# Altium PCB imx6_cpu_board.PcbDoc (part 7 of 9)
Units mil, origin at the board's own origin, x right, y up, seen from the top; angles counter-clockwise.
Board outline 2598.43 x 2362.2 mil, 8 copper layers (Top Layer, GND1, Signal Layer 1, POWER1, POWER2, Signal Layer 2, GND2, Bottom Layer), stack 66.304 mil thick; 354 components, 422 nets, 2180 pads, 1333 vias.
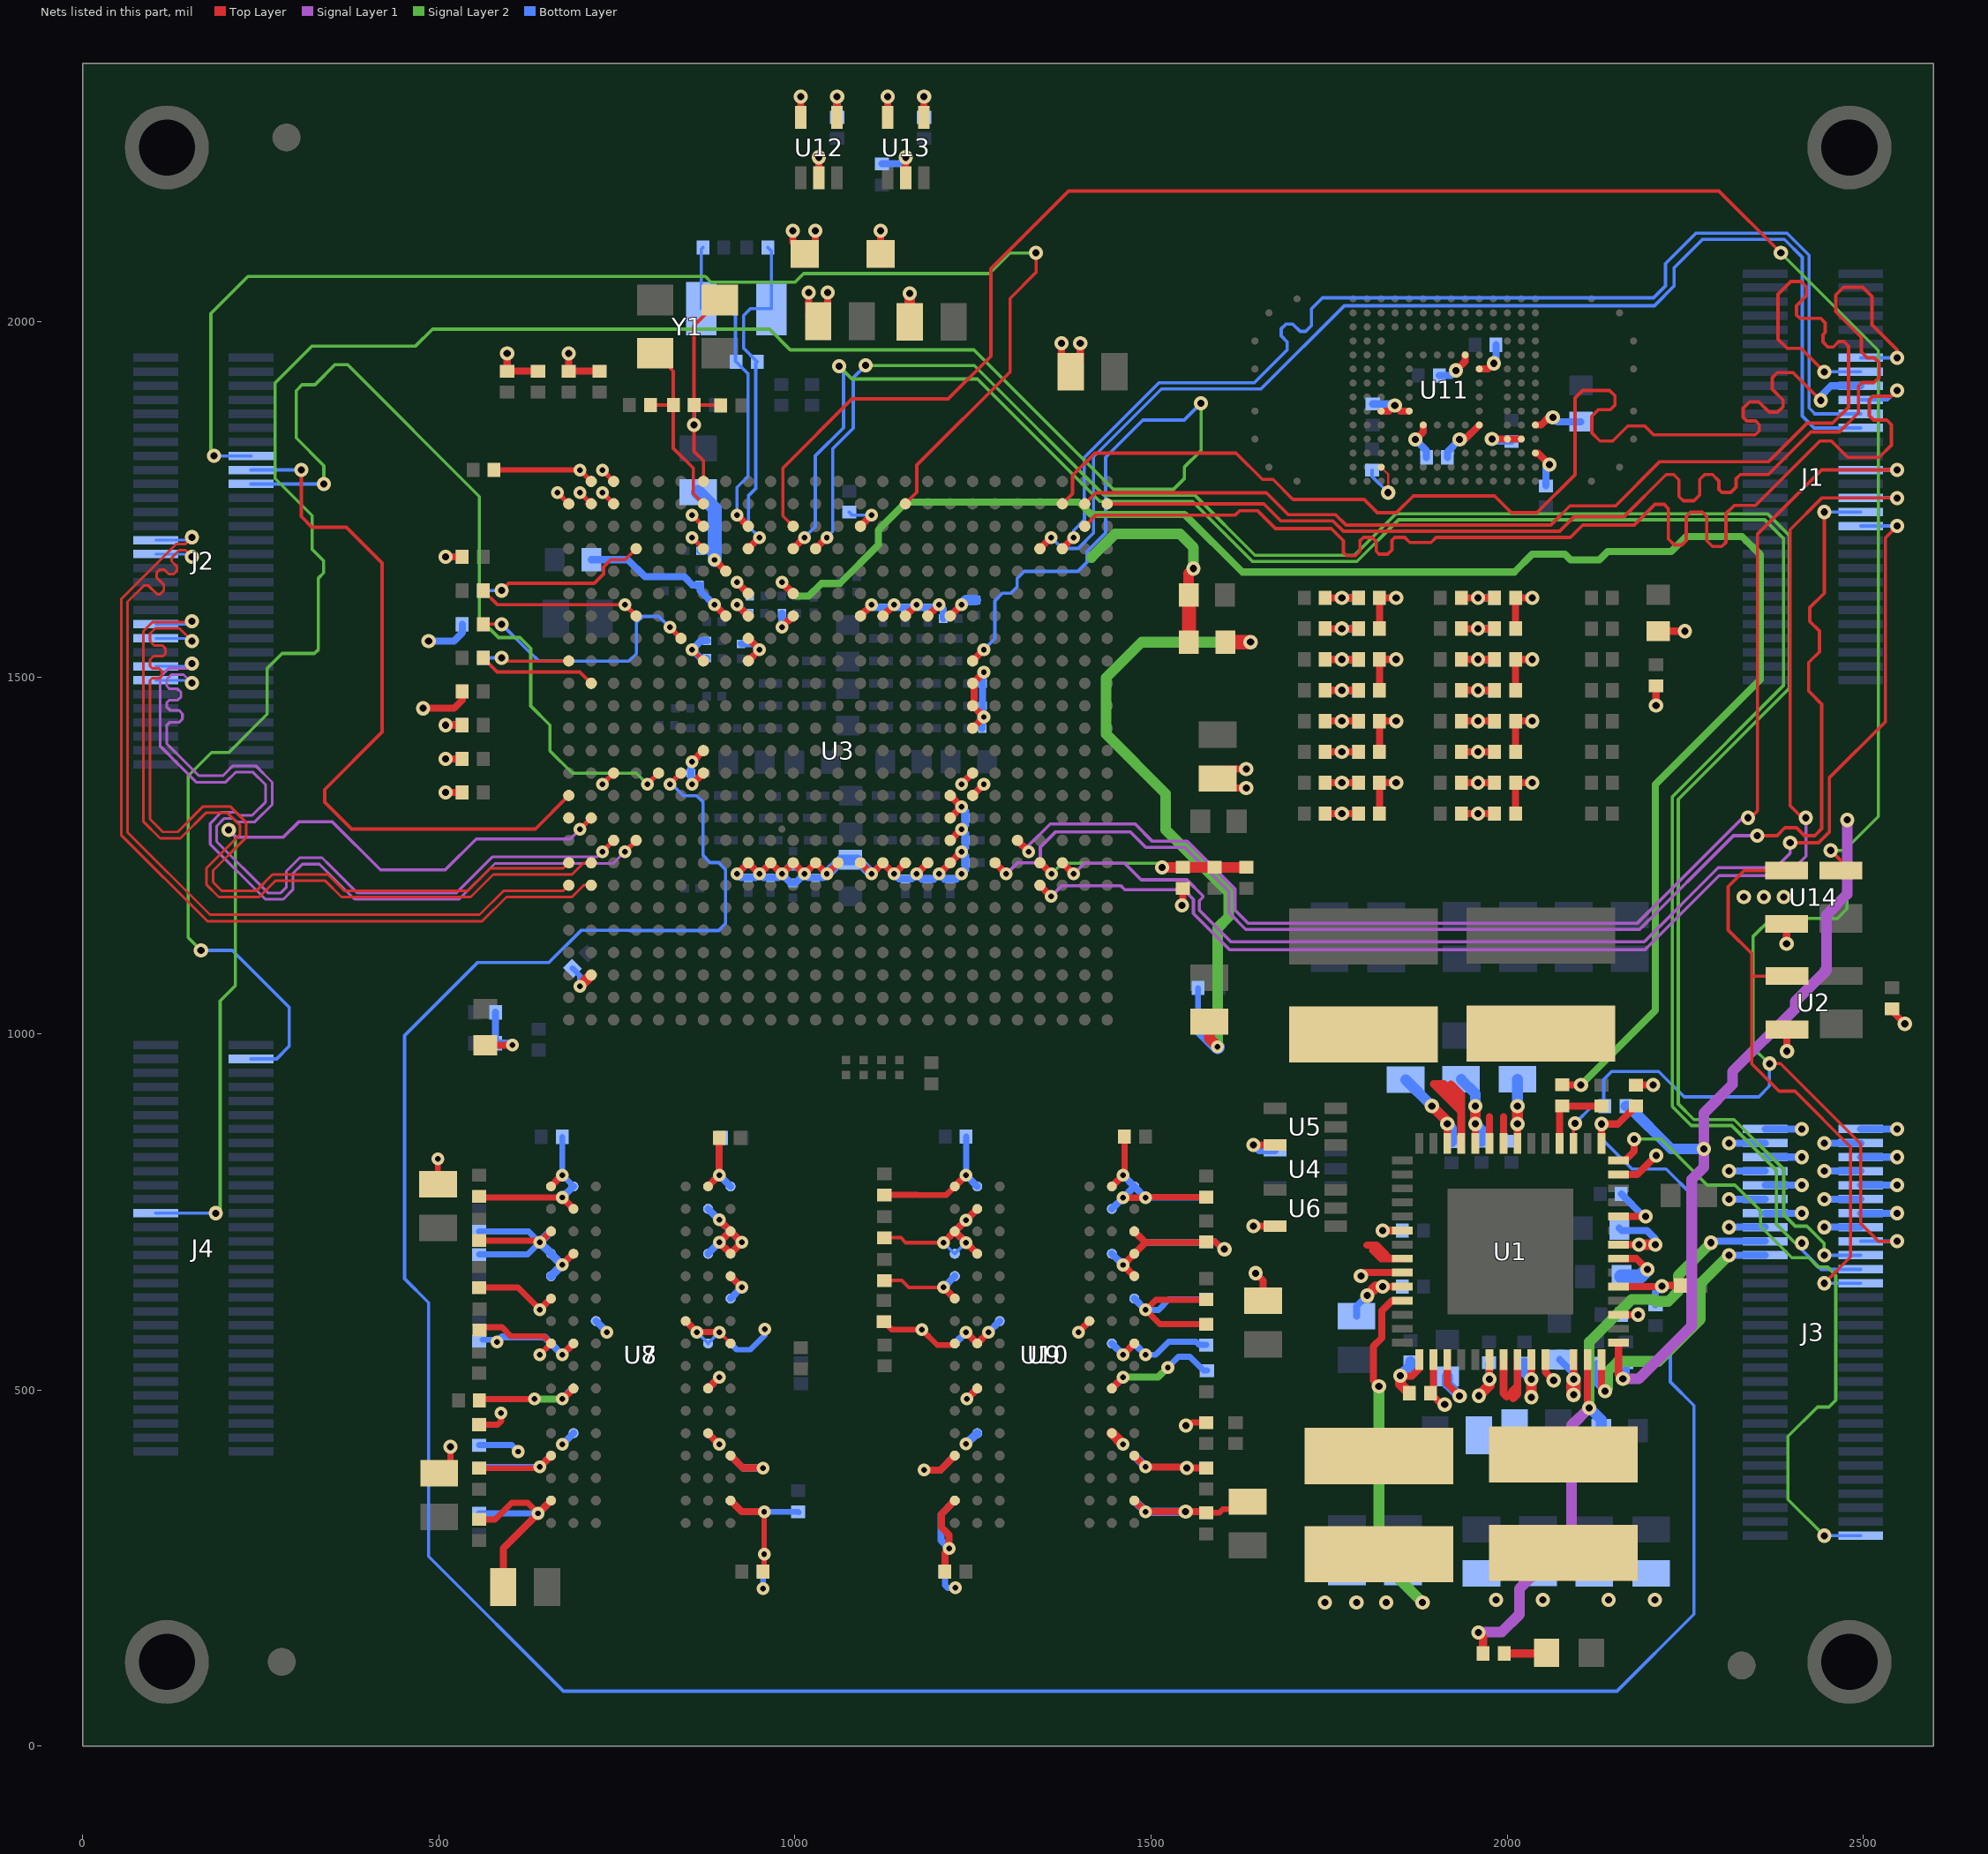
[diagram p13: the nets of this part, all layers, seen from the top]

## Via types
v1: diameter 18, hole 8, Top Layer to Bottom Layer, tented both sides, 768 vias
v2: diameter 20, hole 10, Top Layer to Bottom Layer, tented both sides, 565 vias

## Nets (pads, with @x,y where several pads share a name; then routed paths per layer and width w, separated by ;. In a path a pad name is that pad's centre, name@x,y a point inside that pad or via, vN(x,y) a via of type N, cw(c..) or ccw(c..) an arc to the next point about the centre after c; other vN are vias at no path point) (continued)
LVDS0-TX1_N: J2.45 U3.U4 | length 1250.3
  Top Layer w7: v1(761.17,1255.61) U3.U4@776.92,1271.36
  Signal Layer 1 w3.8: v2(153.54,1519.72) 146.83,1513 120.87,1513 109,1501.13 109,1403.39 159.28,1353.1 200.83,1353.1 214.73,1367 239.27,1367 257,1349.27 257,1325.38 238.02,1306.41 219.74,1306.41 215.29,1310.85 194.71,1310.85 179,1295.14 179,1266 256.32,1188.68 281.73,1188.68 295,1201.95 295,1224.58 308.42,1238 332.31,1238 381.64,1188.68 528.4,1188.68 578.73,1239 723.48,1239 744.57,1239.01 v1(761.17,1255.61)
  Bottom Layer w3.7: J2.45@102.36,1515.75 149.57,1515.75 v2(153.54,1519.72)
LVDS0-TX1_P: J2.47 U3.U3 | length 1250.7
  Top Layer w7: v1(729.67,1255.61) U3.U3@745.42,1271.36
  Signal Layer 1 w3.8: v2(153.54,1492.09) 141.64,1504 124.59,1504 118,1497.41 118,1488 122,1484 133.23,1484 138,1479.23 138,1472.83 133.17,1468 121.25,1468 118,1464.75 118,1458.5 122.5,1454 135,1454 140,1449 140,1441.91 135.09,1437 122,1437 118,1433 118,1407.12 163.01,1362.1 197.1,1362.1 211,1376 243,1376 266,1353 266,1321.66 241.75,1297.41 216.01,1297.41 211.57,1301.85 198.43,1301.85 188,1291.42 188,1269.73 260.05,1197.68 278,1197.68 286,1205.68 286,1228.31 304.69,1247 336.04,1247 346.19,1236.85 385.36,1197.68 524.68,1197.68 575,1248 722.05,1248 v1(729.67,1255.61)
  Bottom Layer w3.7: J2.47@102.36,1496.06 149.58,1496.06 v2(153.54,1492.09)
LVDS0-TX2_N: J2.39 U3.V2 | length 1250.3
  Top Layer w3.7: v2(153.54,1578.77) 152.77,1578 98.27,1578 85.49,1565.22 85.49,1297.51 108.77,1274.23 137.16,1274.23 139.8,1276.87 172.93,1310 203.34,1310 220.8,1292.54 220.8,1279.46 174,1232.66 174,1209 191.19,1191.81 247.73,1191.81 270.92,1215 340,1215 363.19,1191.81 544.81,1191.81 576.31,1223.31 686.88,1223.31 703.43,1239.86 U3.V2@713.92,1239.86
  Bottom Layer w3.7: J2.39@102.36,1574.8 149.57,1574.8 v2(153.54,1578.77)
LVDS0-TX2_P: J2.41 U3.V1 | length 1249.6
  Top Layer w3.7: v2(153.54,1551.15) 135.69,1569 102,1569 94.49,1561.49 94.49,1551 100.49,1545 112,1545 116,1541 116,1533 113,1530 99.49,1530 94.49,1525 94.49,1516 97.49,1513 107,1513 111,1509 111,1502 108,1499 97.49,1499 94.49,1496 94.49,1301.24 112.5,1283.23 133.43,1283.23 169.2,1319 207.07,1319 229.8,1296.27 229.8,1275.73 183,1228.93 183,1212.73 194.92,1200.81 244,1200.81 266.5,1223.31 344.42,1223.31 366.92,1200.81 541.08,1200.81 572.58,1232.31 674.88,1232.31 U3.V1@682.43,1239.86
  Bottom Layer w3.7: J2.41@102.36,1555.12 149.58,1555.12 v2(153.54,1551.15)
LVDS0-TX3_N: J2.27 U3.W2 | length 1250.3
  Top Layer w3.7: v2(153.54,1696.88) 144.23,1687.57 131.57,1687.57 53.99,1609.99 53.99,1279.01 175,1158 561,1158 594.81,1191.81 686.88,1191.81 703.43,1208.36 U3.W2@713.92,1208.36
  Bottom Layer w3.7: J2.27@102.36,1692.91 149.57,1692.91 v2(153.54,1696.88)
LVDS0-TX3_P: J2.29 U3.W1 | length 1250.3
  Top Layer w3.7: v2(153.54,1669.26) 144.23,1678.57 135.3,1678.57 124.73,1668 124.73,1663.27 132,1656 132,1649.3 128,1645.3 120.7,1645.3 114.36,1651.64 108.36,1651.64 104,1647.27 104,1640 114,1630 114,1622.36 108.64,1617 104.28,1617 92.33,1628.95 85.68,1628.95 62.99,1606.26 62.99,1282.74 178.73,1167 557.27,1167 591.08,1200.81 674.88,1200.81 U3.W1@682.43,1208.36
  Bottom Layer w3.7: J2.29@102.36,1673.23 149.58,1673.23 v2(153.54,1669.26)
MAIN-POWER: C1.1 C4.1 C12.1 C13.1 C18.1 C19.1 C24.1 C25.1 C26.1 C27.1 C30.1 C31.1 C32.1 C35.1 C36.1 C37.2 J3.1 J3.2 J3.3 J3.4 J3.5 J3.6 J3.7 J3.8 U1.7 U1.10 U1.12 U1.20 U1.23 U1.24 U1.34 U1.37 U1.40 U1.45 U1.50 | length 1383.5
  Top Layer w10: v2(1794.41,659.89) 1799.12,664.61 U1.23@1852.72,664.61 ; v2(1825.16,644.93) U1.24@1852.64,644.93 ; v2(1825.16,723.67) U1.20@1852.64,723.67 ; U1.12@1915.79,845.79 v2(1915.79,873.35) ; U1.10@1955.16,845.79 v2(1955.16,873.27) ; v2(1974.83,514.93) U1.34@1974.83,542.42 ; U1.7@2014.21,845.79 v2(2014.21,873.27) ; v2(2033.89,514.93) U1.37@2033.89,542.42 ; v2(2092.95,515.01) U1.40@2092.95,542.49 ; U1.50@2156.02,703.98 v2(2184.68,703.98) ; U1.45@2156.02,605.56 v2(2183.57,605.56)
  Top Layer w15: v2(1803.15,632.34) 1815.74,644.93 v2(1825.16,644.93) ; v2(1894.06,898.54) 1915.79,876.81 v2(1915.79,873.35) ; v2(1955.16,873.27) v2(1955.16,898.47) ; v2(1960.06,491.67) 1974.83,506.45 v2(1974.83,514.93) ; v2(2014.21,873.27) v2(2014.21,898.47) ; v2(2033.89,489.74) v2(2033.89,514.93) ; v2(2184.68,703.98) v2(2207.91,703.98)
  Top Layer w20: v2(2092.95,492.96) v2(2092.95,515.01)
  Bottom Layer w10: C36.1@1788.22,603.59 1788.22,617.42 v2(1803.15,632.34) ; v2(1825.16,723.67) C32.1@1852.64,723.67 ; C27.1@1974.44,537.84 1974.44,515.32 v2(1974.83,514.93) ; C4.1@2073.27,542.49 2092.95,522.81 v2(2092.95,515.01) ; C1.1@2157.18,727 2160.51,723.67 2196,723.67 2207.91,711.76 v2(2207.91,703.98) ; C37.2@2160.66,605.56 v2(2183.57,605.56) ; v2(2311.02,807.09) J3.7@2362.2,807.09 ; v2(2311.02,846.46) J3.3@2362.2,846.46 ; J3.5@2362.2,826.77 v2(2413.39,826.77) ; J3.1@2362.2,866.14 v2(2413.39,866.14) ; v2(2444.88,807.09) J3.8@2496.06,807.09 ; v2(2444.88,846.46) J3.4@2496.06,846.46 ; J3.6@2496.06,826.77 v2(2547.24,826.77) ; J3.2@2496.06,866.14 v2(2547.24,866.14)
  Bottom Layer w15: C31.1@1857.12,935.48 v2(1894.06,898.54) ; v2(1915.79,873.35) 1921.69,867.45 C30.1@1921.69,848.47 ; C25.1@1935.07,935.87 1955.16,915.79 v2(1955.16,898.47) ; v2(1955.16,873.27) 1963.81,864.61 C24.1@1963.81,848.86 ; v2(2014.21,898.47) C19.1@2014.21,935.87 ; C12.1@2024.05,537.45 2024.05,524.78 v2(2033.89,514.93)
MIC-DET: J4.25 U3.T2 | length 1219.3
  Top Layer w7: v1(698.17,1287.1) U3.T2@713.92,1302.85
  Signal Layer 1 w4.5: v2(205,1286) 215,1276 282,1276 303.25,1297.25 350.75,1297.25 418,1230 508.95,1230 552.38,1273.43 684.5,1273.43 v1(698.17,1287.1)
  Signal Layer 2 w4.5: v2(186.97,748.03) 193,754.06 193,1046 214.5,1067.5 214.5,1276.5 v2(205,1286)
  Bottom Layer w4.7: J4.25@102.36,748.03 v2(186.97,748.03)
  Bottom Layer w10: v2(186.97,748.03) v2@188,747
MR: J3.24 U2.3 U14.3 | length 848.4
  Top Layer w4.5: 2343.19,1080.81 U2.3@2392.57,1080.81 ; U14.3@2392,1229 2332.44,1229 2310,1206.56 2310,1145.51 2343,1112.51 2343,957.84 2381.55,919.29 2403.71,919.29 2482,841 2482,686.72 v2(2444.88,649.61)
  Bottom Layer w4.5: v2(2444.88,649.61) J3.24@2496.06,649.61
MX6-ONOFF: J3.20 U3.D12 | length 2984.1
  Top Layer w10: U3.D12@1028.88,1680.8 v1(1044.63,1696.55)
  Signal Layer 2 w4.5: v2(1099,1938) 1251.9,1938 1434.31,1755.59 1561.66,1755.59 1645.75,1671.5 1785.27,1671.5 1843.77,1730 2365,1730 2396,1699 2396,1485 2240,1329 2240,901.3 2261.8,879.5 2318.3,879.5 2388,809.8 2388,745.86 2404,729.86 2420.39,729.86 2444.88,705.36 v2(2444.88,688.98)
  Bottom Layer w4.7: v1(1044.63,1696.55) 1053,1704.92 1053,1821.12 1081.88,1850 1081.88,1920.88 v2(1099,1938) ; v2(2444.88,688.98) J3.20@2496.06,688.98
NetC3_1: C3.1 U1.52 | length 85.4
  Top Layer w10: U1.52@2156.02,743.35 v2(2194.13,743.35)
  Bottom Layer w10: C3.1@2159.88,774.85 2191.38,743.35 v2(2194.13,743.35)
NetC5_1: C5.1 U1.49 | length 87.3
  Top Layer w10: U1.49@2156.02,684.3 2181.13,684.3 v2(2196.49,668.94)
  Bottom Layer w20: C5.1@2160.18,659 2186.55,659 v2(2196.49,668.94)
NetC8_2: C8.2 C10.1 U1.29 | length 98.5
  Top Layer w10: v2@1850.03,519.34 1866.18,519.34 1876.42,529.58 U1.29@1876.42,542.49
  Top Layer w15: v2@1850.03,519.34 1850.03,507.93 C8.2@1862.64,495.32
  Bottom Layer w15: v2(1849.64,519.73) 1864.21,534.3 C10.1@1864.21,539.42
NetC91_1: C91.1 U3.G9 | length 44.6
  Top Layer w10: v1@918.65,1602.07 U3.G9@934.4,1586.32
  Bottom Layer w10: v1(918.65,1602.07) 930.54,1590.18 C91.1@936.05,1590.18
NetC100_1: C100.1 C101.1 U3.E8 | length 146.3
  Top Layer w10: v1(887.15,1665.06) U3.E8@902.9,1649.31
  Bottom Layer w10: C100.1@867.15,1677.58 886.57,1677.58
  Bottom Layer w20: C101.1@864,1760.1 887.15,1736.95 v1(887.15,1665.06)
NetC108_1: C108.1 R11.2 R13.1 U3.V22 | length 304.6
  Top Layer w10: U3.V22@1344.32,1240.18 v1(1360.07,1224.43)
  Top Layer w15: v2(1515.37,1233.47) R11.2@1544.25,1233.47 R13.1@1589,1233.47 C108.1@1633.75,1233.47
  Signal Layer 2 w4.5: v1(1360.07,1224.43) 1375,1239.36 1509.49,1239.36 v2(1515.37,1233.47)
NetC114_1: C114.1 C115.1 U3.F9 | length 88.4
  Top Layer w10: v1(918.65,1633.56) U3.F9@934.4,1617.81
  Top Layer w15: C114.1@1161.24,1999.23 v2@1161.24,2038.61
  Bottom Layer w10: v1(918.65,1633.56) 936.44,1615.77 C115.1@936.44,1614.19
  other v2: 1161.24,2039
NetC117_1: C117.1 R27.1 R30.2 U3.A7 Y1.1 | length 340.6
  Top Layer w4.7: U3.A7@871.4,1775.29 871.4,1804.4 858.27,1817.53 v2(858.27,1854.7) 858.27,1882.28 R27.1@858.27,1882.68 ; Y1.1@894.32,2029.94 858.27,1993.89 R27.1@858.27,1882.68 ; R30.2@895.68,1881.89 895.28,1882.28 R27.1@858.66,1882.28 R27.1@858.27,1882.68
  Bottom Layer w4.7: v2(858.27,1854.7) 858.7,1855.13 C117.1@858.7,1882.4
NetC118_1: C118.1 R27.2 U3.B7 Y1.3 | length 271.3
  Top Layer w4.7: C118.1@797.24,1882.28 R27.2@829.14,1882.28 ; Y1.3@803.76,1955.14 829.14,1929.76 R27.2@829.14,1882.28 ; U3.B7@871.4,1743.8 857.15,1758.05 857.15,1793.85 829.14,1821.86 R27.2@829.14,1882.28
NetC119_1: C119.1 R28.1 U3.D9 Y2.1 | length 480.9
  Top Layer w10: U3.D9@934.41,1680.8 v1(950.16,1696.55)
  Bottom Layer w4.7: R28.1@944.8,1941.1 944.8,1765.52 934.79,1755.51 934.79,1711.92 v1(950.16,1696.55) ; R28.1@946.9,1943.2 927.8,1962.3 927.8,2008 937.6,2017.8 Y2.1@966.8,2017.8 966.8,2098.7 C119.1@961.9,2103.6
NetC120_1: C120.1 R28.2 U3.C9 Y2.2 | length 454.6
  Top Layer w10: v1(918.65,1728.05) U3.C9@934.4,1712.3
  Bottom Layer w4.7: C120.1@870.6,2103.6 868.38,2101.38 Y2.2@868.38,2017.8 906.5,2017.8 916.3,2008 916.3,1944.28 R28.2@917.38,1943.2 934,1926.58 934,1782.3 918.65,1766.95 v1(918.65,1728.05)
NetC124_1: C124.1 L5.2 U3.G8 | length 226.5
  Top Layer w10: v1@887.15,1602.07 U3.G8@902.9,1586.32
  Bottom Layer w10: L5.2@714,1665.38 765.48,1665.38 789.49,1641.36 844.4,1641.36 855.78,1629.98 C124.1@866,1629.98 867.15,1629.98 867.15,1621.67 886.75,1602.07 v1(887.15,1602.07)
NetC199_1: C199.1 U11.K2 | length 80.7
  Top Layer w3: U11.K2@1822.84,1795.27 1832.72,1785.39 v2@1832.72,1759.59 ; v2(1832.68,1759.55) v2@1832.72,1759.59
  Bottom Layer w4.7: C199.1@1810,1790.99 1810,1782.23 v2(1832.68,1759.55)
NetD1_1: D1.1 R3.2 | length 59.5
  Top Layer w12: R3.2@1995.52,130 D1.1@2054,130 ; D1.1@2054,131 D1.1@2055,131
NetL1_1: L1.1 U1.35 U1.36 | length 122.2
  Top Layer w11: U1.35@1994.53,542.49 1994.53,495.53 1999.36,490.69 ; 2006.22,497.1 2014.21,505.09 ; 2008,488 2014.21,494.21 2014.21,505.09 ; U1.36@2014.21,542.49 2014.21,505.09
NetL2_1: L2.1 U1.8 U1.9 | length 75.1
  Top Layer w10: U1.9@1974.84,845.79 1974.84,883.34 ; U1.8@1994.53,845.79 1994.53,883.34
NetL3_1: L3.1 U1.11 | length 193.4
  Top Layer w11: 1920.76,928.9 1935.47,914.19 1935.47,904.51 ; U1.11@1935.47,845.79 1935.47,890.44 ; 1935.47,890.44 1896.56,929.34 1910.63,929.34 1935.47,904.51 ; 1935.47,890.44 1935.47,904.51
NetL4_1: L4.1 U1.22 | length 99.3
  Top Layer w10: 1803,703 1816.55,703 1823.98,695.57 ; U1.22@1852.72,684.3 1835.25,684.3 ; 1823.98,695.57 1835.25,684.3 ; 1823.98,695.57 1811.02,695.57 1822.3,684.3 1835.25,684.3
NetR2_2: R2.2 R4.2 U1.4 | length 109.6
  Top Layer w10: U1.4@2073.27,845.79 2073.27,894.72 R2.2@2077.09,898.54 2132.24,898.54 R4.2@2132.32,898.47
NetR5_2: R5.2 R6.2 U1.47 | length 117.1
  Top Layer w10: U1.47@2156.02,644.93 2216.18,644.93 v2(2216.96,645.72) 2217.75,646.5 R5.2@2242.56,646.5
  Bottom Layer w10: R6.2@2208,619.52 2208,636.75 v2(2216.96,645.72)
NetR19_1: R19.1 U3.D4 | length 244.7
  Top Layer w4.7: v2(588.02,1622.07) 598.11,1632.16 718,1632.16 731.07,1645.23 731.07,1655.26 741.19,1665.38 761.49,1665.38 U3.D4@776.92,1680.8
  Bottom Layer w4.7: R19.1@562.42,1622.07 v2(588.02,1622.07)
NetR20_1: R20.1 U3.G4 | length 229.3
  Top Layer w4.7: R20.1@562.42,1622.07 582.41,1602.07 v1(761.17,1602.07)
  Top Layer w7: v1(761.17,1602.07) U3.G4@776.92,1586.32
NetR24_1: R24.1 U3.C14 | length 55.5
  Top Layer w10: U3.C14@1091.88,1712.3 v1(1107.63,1728.05)
  Bottom Layer w4.7: R24.1@1076.08,1732 1080.03,1728.05 v1(1107.63,1728.05)
NetR25_2: R25.2 U3.H6 | length 363.3
  Top Layer w4.7: R25.2@562.42,1574.82 v2(588.02,1574.82)
  Top Layer w7: v1(824.16,1570.57) U3.H6@839.91,1554.82
  Bottom Layer w4.7: v2(588.02,1574.82) 626.88,1535.95 627.39,1535.95 640.3,1523.04 766.84,1523.04 777.31,1533.5 777.31,1576.93 786.3,1585.92 808.81,1585.92 v1(824.16,1570.57)
NetR29_1: R29.1 U3.K2 | length 166.3
  Top Layer w4.7: R29.1@562.42,1527.58 582.1,1507.89 697.85,1507.89 U3.K2@713.92,1491.83
NetR31_1: R31.1 U3.J1 | length 122
  Top Layer w4.7: v2(588.02,1527.58) 592.56,1523.04 682.15,1523.04 U3.J1@682.43,1523.32
  Bottom Layer w4.7: R31.1@562.42,1527.58 v2(588.02,1527.58)
NetR32_1: R32.1 U3.A2 | length 143
  Top Layer w7: R32.1@577.52,1791.34 697.87,1791.34 v1(698.17,1791.04) U3.A2@713.92,1775.29
NetR43_1: R43.1 U11.U5 | length 68.1
  Top Layer w10: v2(1933,1834) 1940.3,1834 U11.U5@1960.63,1854.33
  Bottom Layer w10: R43.1@1916,1809 1916,1817 v2(1933,1834)
NetR48_2: R48.2 R83.1 R84.2 | length 69.9
  Top Layer w10: R84.2@1744.39,1395.46 v2(1767.69,1395.46) R48.2@1791,1395.46
  Bottom Layer w10: v2(1767.69,1395.46) R83.1@1791,1395.46
NetR49_2: R49.2 R80.1 R81.2 | length 69.9
  Top Layer w10: R81.2@1744.39,1482.08 v2(1767.69,1482.08) R49.2@1791,1482.08
  Bottom Layer w10: v2(1767.69,1482.08) R80.1@1791,1482.08
NetR50_2: R50.2 R78.1 R79.2 | length 69.9
  Top Layer w10: R79.2@1935.38,1525.37 v2(1958.69,1525.37) R50.2@1981.99,1525.37
  Bottom Layer w10: v2(1958.69,1525.37) R78.1@1981.99,1525.37
NetR51_2: R51.2 R76.1 R77.2 | length 69.9
  Top Layer w10: R77.2@1935.38,1568.68 v2(1958.69,1568.68) R51.2@1981.99,1568.68
  Bottom Layer w10: v2(1958.69,1568.68) R76.1@1981.99,1568.68
NetR52_2: R52.2 R74.1 R75.2 | length 69.9
  Top Layer w10: R75.2@1744.39,1612 v2(1767.69,1612) R52.2@1791,1612
  Bottom Layer w10: v2(1767.69,1612) R74.1@1791,1612
NetR53_2: R53.2 R72.1 R73.2 | length 69.9
  Top Layer w10: R73.2@1935.39,1611.98 v2(1958.69,1611.98) R53.2@1982,1611.98
  Bottom Layer w10: v2(1958.69,1611.98) R72.1@1982,1611.98
NetR54_2: R54.2 R70.1 R71.2 | length 69.9
  Top Layer w10: R71.2@1744.39,1568.69 v2(1767.69,1568.69) R54.2@1791,1568.69
  Bottom Layer w10: v2(1767.69,1568.69) R70.1@1791,1568.69
NetR55_2: R55.2 R68.1 R69.2 | length 69.9
  Top Layer w10: R69.2@1935.38,1482.06 v2(1958.69,1482.06) R55.2@1981.99,1482.06
  Bottom Layer w10: v2(1958.69,1482.06) R68.1@1981.99,1482.06
NetR56_2: R56.2 R100.1 R101.2 | length 69.9
  Top Layer w10: R101.2@1744.39,1308.85 v2(1767.69,1308.85) R56.2@1791,1308.85
  Bottom Layer w10: v2(1767.69,1308.85) R100.1@1791,1308.85
NetR57_2: R57.2 R98.1 R99.2 | length 69.9
  Top Layer w10: R99.2@1744.39,1352.16 v2(1767.69,1352.16) R57.2@1791,1352.16
  Bottom Layer w10: v2(1767.69,1352.16) R98.1@1791,1352.16
NetR58_2: R58.2 R96.1 R97.2 | length 69.9
  Top Layer w10: R97.2@1935.38,1438.76 v2(1958.69,1438.76) R58.2@1981.99,1438.76
  Bottom Layer w10: v2(1958.69,1438.76) R96.1@1981.99,1438.76
NetR59_2: R59.2 R93.1 R94.2 | length 69.9
  Top Layer w10: R94.2@1744.39,1438.77 v2(1767.69,1438.77) R59.2@1791,1438.77
  Bottom Layer w10: v2(1767.69,1438.77) R93.1@1791,1438.77
NetR60_2: R60.2 R91.1 R92.2 | length 69.9
  Top Layer w10: R92.2@1935.38,1308.83 v2(1958.69,1308.83) R60.2@1981.99,1308.83
  Bottom Layer w10: v2(1958.69,1308.83) R91.1@1981.99,1308.83
NetR61_2: R61.2 R89.1 R90.2 | length 69.9
  Top Layer w10: R90.2@1935.38,1395.45 v2(1958.69,1395.45) R61.2@1981.99,1395.45
  Bottom Layer w10: v2(1958.69,1395.45) R89.1@1981.99,1395.45
NetR62_2: R62.2 R87.1 R88.2 | length 69.9
  Top Layer w10: R88.2@1935.38,1352.14 v2(1958.69,1352.14) R62.2@1981.99,1352.14
  Bottom Layer w10: v2(1958.69,1352.14) R87.1@1981.99,1352.14
NetR63_2: R63.2 R85.1 R86.2 | length 69.9
  Top Layer w10: R86.2@1744.39,1525.39 v2(1767.69,1525.39) R63.2@1791,1525.39
  Bottom Layer w10: v2(1767.69,1525.39) R85.1@1791,1525.39
NetR95_2: R95.2 U12.4 | length 58
  Top Layer w10: U12.4@1059.07,2286.29 v2(1059.07,2315.27)
  Bottom Layer w10: R95.2@1059.07,2286.29 v2(1059.07,2315.27)
NetR106_2: R106.2 U13.4 | length 58
  Top Layer w10: U13.4@1181.12,2286.29 v2(1181.12,2315.27)
  Bottom Layer w10: R106.2@1181.12,2286.29 v2(1181.12,2315.27)
NVCC-RMII: C102.1 R9.2 R10.2 U3.G18 | length 329.7
  Top Layer w10: U3.G18@1217.86,1586.32 v1(1233.61,1602.07)
  Top Layer w15: R9.2@1552.62,1615.7 1552.62,1646.12 v2(1559.5,1653)
  Top Layer w20: R10.2@1552.92,1549.6 1552.92,1598.95
  Signal Layer 2 w15: 1416,1668.3 1449.2,1701.5 1540.5,1701.5 1559.5,1682.5 v2(1559.5,1653)
  Bottom Layer w15: v1(1233.61,1602.07) 1240.22,1608.68 C102.1@1254.16,1608.68
P0V75-REFDDR: C7.1 C126.1 C127.1 C128.1 C129.1 C130.1 C131.1 C132.1 C133.1 U1.31 U3.AC2 U7.H1 U7.M8 U8.H1 U8.M8 U9.H1 U9.M8 U10.H1 U10.M8 | length 815.3
  Top Layer w8: v1(641.72,549.34) U8.H1@657.46,565.1 ; C131.1@1124.83,595.65 1135.64,584.84 v1(1177.88,584.84) 1199.88,562.84 1222.14,562.84 U10.H1@1224.39,565.1
  Top Layer w8.5: C132.1@557.19,583.84 561.21,587.85 588.62,587.85 601.23,575.24 647.32,575.24 U8.H1@657.46,565.1 ; v2(1548.87,449.85) 1553.08,449.85 1557.33,454.1 C133.1@1577.38,454.1
  Top Layer w10: U8.M8@877.93,439.11 v1(893.69,423.36) ; U1.31@1915.79,542.49 1915.79,508.38 v2(1933,491.17)
  Top Layer w15: v1(698.17,1066.63) U3.AC2@713.92,1082.38 ; U10.M8@1444.86,439.11 v1(1460.62,423.36)
  Bottom Layer w8: C130.1@687.82,1091.72 698.17,1081.37 v1(698.17,1066.63) ; U7.H1@909.43,565.1 918.13,556.39 937.14,556.39 957.38,576.63 v1(957.38,585.34)
  Bottom Layer w8.5: C128.1@556.45,422.58 602.14,422.58 v1(611.38,413.34) ; v1(954.83,220.94) 955.14,221.65 C129.1@955.14,244.94 ; C126.1@1210.38,244.94 1210.38,225.84 1214.13,222.09 v1(1225.38,221.99) ; v1(1492.11,549.34) 1506.38,549.34 1524.43,567.39 1563.02,567.39 1567.33,563.08 C127.1@1577.38,563.08
  Bottom Layer w10: v1(673.22,423.36) U7.M8@688.96,439.11 ; U9.H1@1476.36,565.1 v1(1492.11,549.34)
  Bottom Layer w12: v1(1240.14,424.31) U9.M8@1255.89,439.11
  Bottom Layer w15: C7.1@1915.78,518.94 1915.78,508.39 v2(1933,491.17)
P1V5-DDR-SW3: C8.1 C20.1 C21.1 C22.1 C23.1 C134.1 C135.1 C136.1 C137.1 C138.1 C139.1 C140.1 C141.1 C142.1 C143.1 C144.1 C145.1 C146.1 C147.1 C148.1 C149.1 C150.1 C151.1 C152.1 C153.1 C154.1 C155.1 C156.1 C157.1 C158.1 C159.1 C160.1 C161.1 C162.1 C163.1 C164.1 C165.1 C166.1 C167.1 C168.1 C169.1 C170.1 C171.1 C172.1 C173.1 C174.1 C175.1 C176.1 C177.1 C178.1 C179.1 C180.1 C181.1 C182.1 C183.1 C184.1 C185.1 C186.1 C187.1 C188.1 C189.1 C190.1 C191.1 L1.2 R10.1 U1.30 U1.38 U3.R18 U3.T18 U3.U18 U3.V9 U3.V10 U3.V11 U3.V12 U3.V13 U3.V14 U3.V15 U3.V16 U3.V17 U3.V18 U7.A1 U7.A8 U7.B2 U7.C1 U7.C9 U7.D2 U7.D9 U7.E9 U7.F1 U7.G7 U7.H2 U7.H9 U7.K2 U7.K8 U7.N1 U7.N9 U7.R1 U7.R9 U8.A1 U8.A8 U8.B2 U8.C1 U8.C9 U8.D2 U8.D9 U8.E9 U8.F1 U8.G7 U8.H2 U8.H9 U8.K2 U8.K8 U8.N1 U8.N9 U8.R1 U8.R9 U9.A1 U9.A8 U9.B2 U9.C1 U9.C9 U9.D2 U9.D9 U9.E9 U9.F1 U9.G7 U9.H2 U9.H9 U9.K2 U9.K8 U9.N1 U9.N9 U9.R1 U9.R9 U10.A1 U10.A8 U10.B2 U10.C1 U10.C9 U10.D2 U10.D9 U10.E9 U10.F1 U10.G7 U10.H2 U10.H9 U10.K2 U10.K8 U10.N1 U10.N9 U10.R1 U10.R9 | length 7678.1
  Top Layer w4.7: v1(893.62,581.09) 909.43,565.28 U8.H9@909.42,565.1
  Top Layer w5: C169.1@1125.38,653.58 1150.14,653.58 1159.89,643.83 v1(1208.65,643.83) ; C168.1@1125.38,713.58 1148.38,713.58 1155.38,706.58 v1(1208.4,706.58)
  Top Layer w8: C144.1@498.84,788.57 v1(498.84,824) ; C166.1@955.14,244.94 956.68,246.48 v1(956.68,269.34) v1(956.68,328.87) ; C136.1@1577.38,327.35 1595.38,327.35 1600.37,332.34 1624.67,332.34 C182.1@1635.38,343.05
  Top Layer w8.5: C184.1@500.38,383.05 516.28,398.95 v2(516.28,420.34) ; C149.1@556.45,318.1 579.04,318.1 602.33,341.39 624.67,341.39 v1(639.46,326.6) ; C148.1@556.45,390.1 639.96,390.1 v1(641.72,391.86) ; C146.1@556.45,451.1 582.33,451.1 587.33,456.1 v1(587.33,467.34) ; C170.1@556.45,771.58 557.96,770.06 v1(673.14,770.06) ; C147.1@556.7,643.58 611.14,643.58 641.64,613.08 v1(641.64,612.58) ; C151.1@556.7,709.58 639.14,709.58 v1(641.64,707.07) ; C150.1@557.14,485.34 558.88,487.08 v1(634.12,487.08) ; C171.1@1125.38,773.58 1171.6,773.58 1171.63,773.54 1212.38,773.54 U10.A1@1224.39,785.57 ; v1(1460.62,801.31) 1462.62,803.31 C153.1@1462.62,855.34 ; 1492.11,706.82 1573.62,706.82 C139.1@1577.38,707.58 1578.69,708.89 1589.33,708.89 1600.83,697.39 v2(1602.88,697.39) ; v1(1492.11,769.81) 1492.88,770.58 C152.1@1577.38,770.58 ; C135.1@1577.38,592.1 1512.34,592.1 v1(1492.11,612.33) 1506.36,626.58 C134.1@1577.38,626.58
  Top Layer w9: v1(862.13,581.09) 871.52,581.09 884.36,581.08 v1(893.62,581.09) ; v1(1460.62,769.81) v1(1492.11,769.81)
  Top Layer w10: C191.1@565.18,983.75 603.08,983.75 603.57,983.75 v1@604.05,983.75 ; C183.1@590.38,223.05 590.38,277.53 595.38,282.53 v1(639.46,326.6) U8.R1@657.46,344.63 ; v1(641.64,612.58) 657.14,628.08 U8.F1@657.46,628.09 ; v1(641.64,707.07) 657.14,722.57 U8.C1@657.46,722.58 ; v1(641.72,391.86) U8.N1@657.46,407.62 ; U8.A1@657.46,785.57 657.47,785.89 v1(673.14,801.56) ; v1(673.14,675.58) 688.63,691.07 U8.D2@688.95,691.08 ; v1(673.14,770.06) 688.96,754.24 U8.B2@688.95,754.07 ; v1(673.22,487.08) 677.48,491.34 678.21,491.34 U8.K2@688.95,502.11 ; v1(673.28,549.09) 673.28,549.4 U8.H2@688.95,565.1 ; U8.G7@846.43,596.59 846.63,596.58 v1(862.13,581.09) ; U8.K8@877.93,502.11 v1(893.69,517.84) ; U8.A8@877.93,785.57 877.94,785.75 877.88,785.81 v1(893.62,801.56) C167.1@893.69,853.74 C167.1@893.69,853.74 ; v1(893.62,738.57) 909.43,722.76 U8.C9@909.42,722.58 ; U8.R9@909.42,344.63 925.18,328.87 v1(956.68,328.87) ; U8.N9@909.42,407.62 926.7,390.34 v1(955.33,390.34) ; U8.E9@909.42,659.59 909.62,659.58 v1(925.12,644.08) ; U8.D9@909.42,691.08 U8.D9@909.43,691.26 ; v1(918.65,1224.11) U3.V9@934.4,1239.86 v1(950.14,1224.11) U3.V10@965.89,1239.86 v1(981.64,1224.11) U3.V11@997.39,1239.86 v1(1013.14,1224.11) U3.V12@1028.88,1239.86 v1(1044.63,1224.11) U3.V13@1060.38,1239.86 ; U3.V14@1091.88,1239.86 v1(1107.62,1224.11) U3.V15@1123.37,1239.86 v1(1139.12,1224.11) U3.V16@1154.87,1239.86 ; v1(1170.62,1224.11) U3.V17@1186.36,1239.86 ; v1(1181.38,387.34) 1204.13,387.34 U10.N1@1224.39,407.62 ; v1(1202.11,1224.11) U3.V18@1217.86,1239.86 v1(1233.61,1255.61) ; v1(1208.4,706.58) U10.C1@1224.39,722.58 ; v1(1208.65,643.83) U10.F1@1224.39,628.09 ; C137.1@1210.38,244.94 1210.38,271.14 v1(1216.38,277.14) 1216.38,296.34 1205.38,307.34 1205.38,325.6 U10.R1@1224.39,344.63 ; U3.U18@1217.86,1271.36 v1(1233.61,1287.1) ; U3.T18@1217.86,1302.85 v1(1233.61,1318.6) U3.R18@1217.86,1334.35 ; U10.A1@1224.39,785.57 v1(1240.14,801.31) ; v1(1240.14,580.84) U10.H2@1255.88,565.1 v1(1271.64,580.84) ; v1(1241.23,487.09) 1255.89,501.75 U10.K2@1255.88,502.11 ; U10.D2@1255.88,691.08 v1(1240.14,706.82) U10.C1@1224.39,722.58 ; U10.B2@1255.88,754.07 v1(1240.14,738.32) U10.C1@1224.39,722.58 ; v1@1397.62,580.84 1397.67,580.89 U10.G7@1413.36,596.59 ; U10.K8@1444.86,502.11 v1(1460.62,517.84) ; U10.A8@1444.86,785.57 v1(1460.62,801.31) ; v1(1460.62,549.34) U10.H9@1476.35,565.1 ; U10.R9@1476.35,344.63 v1(1492.11,328.87) v2(1548.38,328.87) 1575.86,328.87 C136.1@1577.38,327.35 ; U10.N9@1476.35,407.62 v1(1492.11,391.86) 1548.38,391.86 v2(1549.89,390.35) C138.1@1577.38,390.35 ; U10.E9@1476.35,659.59 v1(1460.62,675.32) U10.D9@1476.35,691.08 1492.11,706.82 U10.C9@1476.35,722.58 ; v2(1646.53,663.8) 1657,653.33 C145.1@1657,625.24 ; U1.30@1896.1,542.49 1896.1,499.26 C8.1@1892.16,495.32 1908.14,479.34 v2(1912,479.34) ; U1.38@2053.58,542.49 2053.58,524.77 v2(2065,513.34) ; U8.D9@909.43,691.26 v1(893.62,707.07) 909.12,722.57 U8.C9@909.42,722.58 ; U8.D9@909.43,691.26 909.43,691.38 v1(925.12,707.07) 909.62,722.57 U8.C9@909.42,722.58
  Top Layer w15: C165.1@1581.52,1016.91 1581.52,993.29 v1(1593.33,981.48)
  Top Layer w20: R10.1@1604.1,1549.6 v2(1639.5,1549.6)
  Signal Layer 2 w10: v1(634.12,487.08) v1(673.22,487.08) ; v1(1460.62,517.84) 1509.88,517.84 v1(1523.38,531.34)
  Signal Layer 2 w15: v1(1593.33,981.48) 1593.33,1148.64 1609,1164.31 1609,1197.6 1520.5,1286.09 1520.5,1336.65 1436.82,1420.32 1436.82,1499.82 1486.6,1549.6 v2(1639.5,1549.6)
  Bottom Layer w4.7: v1(862.13,581.09) U7.H2@877.94,565.28 ; U7.H2@877.94,565.1 U7.H2@877.94,565.28 ; v1(893.62,581.09) 877.94,565.41 U7.H2@877.94,565.28 ; U9.C9@1224.4,722.58 v1(1208.4,706.58) 1223.91,691.07 U9.D9@1224.4,691.08 v1(1240.14,706.82) ; v2(1549.89,390.35) C164.1@1577.38,390.35
  Bottom Layer w8: C181.1@673.21,855.34 C181.1@673.14,855.27 v1(673.14,801.56) U7.A8@688.96,785.74 ; U7.R1@909.43,344.63 925.18,328.87 v1(956.68,328.87) C179.1@1004.41,328.87 C179.1@1005.45,327.83 ; C159.1@1565.77,1020.85 C143.1@1565.77,1064.16
  Bottom Layer w8.5: C158.1@556.38,326.6 v1(639.46,326.6) ; C157.1@556.38,390.1 560.14,391.86 v1(641.72,391.86) ; C156.1@556.45,690.1 624.67,690.1 v1(641.64,707.07) 626.14,722.58 C154.1@556.45,722.58 ; C155.1@561.15,570.27 578.59,570.27 v1(581.74,567.12) ; v1(1240.14,801.31) C160.1@1240.14,855.34 ; U9.C1@1476.36,722.58 1492.11,706.82 1573.62,706.82 C161.1@1577.38,707.58 1578.69,708.89 1588.83,708.89 1600.33,697.39 v2(1602.88,697.39) ; v1(1492.11,612.33) 1510.38,612.33 1525.39,627.34 1574.12,627.34 C162.1@1577.38,627.08 ; v1(1492.11,769.81) 1573.62,769.81 C142.1@1577.38,770.58 ; v1(1523.38,531.34) 1538.38,546.34 1554.38,546.34 1573.62,527.1 C163.1@1578.38,527.1
  Bottom Layer w10: C141.1@579.55,1029.91 C140.1@579.55,986.6 600.81,986.6 v1(603.57,983.84) ; v1(581.74,567.12) 588.96,574.34 648.38,574.34 657.47,565.25 U7.H9@657.47,565.1 657.47,564.9 v1(673.28,549.09) ; v1(639.46,326.6) U7.R9@657.47,344.63 ; v1(641.72,391.86) U7.N9@657.47,407.62 ; v1(673.14,770.06) 688.8,785.73 688.88,785.81 688.96,785.73 U7.A8@688.96,785.57 ; v1(673.22,487.08) 688.6,502.47 688.96,502.83 U7.K8@688.96,502.11 ; U7.G7@720.46,596.59 720.46,596.76 720.55,596.67 v1(736.13,581.09) ; U7.K2@877.94,502.11 v1(893.69,517.84) ; U7.D2@877.94,691.08 877.94,691.39 v1(893.62,707.07) 909.12,722.57 U7.C1@909.43,722.58 ; U7.B2@877.94,754.07 878.13,754.06 v1(893.62,738.57) 909.43,722.76 U7.C1@909.43,722.58 ; C178.1@896.62,853.74 893.62,850.74 v1(893.62,801.56) 909.43,785.75 U7.A1@909.43,785.57 ; U7.N1@909.43,407.62 926.7,390.34 v1(955.33,390.34) ; U7.F1@909.43,628.09 909.43,628.39 v1(925.12,644.08) ; v1(918.65,1224.11) 923.88,1218.88 C189.1@934.28,1218.88 944.91,1218.88 v1(950.14,1224.11) 955.37,1218.88 C177.1@965.77,1218.88 976.41,1218.88 v1(981.64,1224.11) ; v1(925.12,707.07) 909.62,722.57 U7.C1@909.43,722.58 ; v1(1044.63,1224.11) 1039.4,1218.88 C185.1@1028.76,1218.88 1018.37,1218.88 v1(1013.14,1224.11) ; v1(1139.12,1224.11) 1145.92,1217.31 C176.1@1154.75,1217.31 1163.81,1217.31 v1(1170.62,1224.11) 1177.82,1216.91 C175.1@1186.24,1216.91 1194.91,1216.91 v1(1202.11,1224.11) 1209.31,1216.91 C174.1@1218.13,1216.91 1226.41,1216.91 v1(1233.61,1224.11) ; v1(1181.38,387.34) 1204.13,387.34 U9.N9@1224.4,407.62 ; v1(1208.65,643.83) U9.E9@1224.4,659.59 ; v1(1216.38,277.14) 1204.81,288.71 1204.81,325.03 U9.R9@1224.4,344.63 ; U9.H9@1224.4,565.1 v1(1240.14,580.84) ; v1(1233.61,1255.61) 1239.39,1249.83 C172.1@1239.39,1240.14 v1@1239.39,1229.9 ; v1(1233.61,1287.1) 1239.39,1281.32 C188.1@1239.39,1271.64 v1@1239.39,1261.4 ; v1(1233.61,1318.6) 1239.39,1312.82 C187.1@1239.39,1303.14 v1@1239.39,1292.89 ; v1(1240.14,706.82) U9.C9@1224.4,722.58 v1(1240.14,738.32) ; v1(1240.14,801.31) U9.A8@1255.89,785.57 ; v1(1241.23,487.09) 1255.89,501.75 U9.K8@1255.89,502.11 ; v1(1271.64,580.84) U9.G7@1287.39,596.59 ; U9.K2@1444.87,502.11 v1(1460.62,517.84) ; U9.H2@1444.87,565.1 v1(1460.62,549.34) ; U9.D2@1444.87,691.08 v1(1460.62,675.32) ; U9.B2@1444.87,754.07 v1(1460.62,769.81) U9.A1@1476.36,785.57 ; v1(1460.62,801.31) U9.A1@1476.36,785.57 ; U9.F1@1476.36,628.09 v1(1492.11,612.33) ; v1(1492.11,769.81) U9.A1@1476.36,785.57 ; v2(1548.38,328.87) 1575.86,328.87 C180.1@1577.38,327.35 ; v1(981.64,1224.11) 993.96,1211.8 C173.1@996.87,1211.8 1000.82,1211.8 v1(1013.14,1224.11) ; v1(981.64,1224.11) 992.55,1235.02 C186.1@997.27,1235.02 1002.23,1235.02 v1(1013.14,1224.11)
  Bottom Layer w12: U7.E9@657.47,659.59 657.47,659.91 v1(673.14,675.58) 657.64,691.07 U7.D9@657.47,691.08 657.47,691.24 v1(641.64,707.07) 657.14,722.57 U7.C9@657.47,722.58 ; U9.R1@1476.36,344.63 v1(1492.11,328.87) v2(1548.38,328.87) ; U9.N1@1476.36,407.62 v1(1492.11,391.86)
  Bottom Layer w15: v1(1044.63,1224.11) 1064.63,1244.12 C190.1@1077.78,1244.12 1087.62,1244.12 v1(1107.62,1224.11)
  Bottom Layer w20: C159.1@1565.77,1020.85 1565.77,1009.04 v1(1593.33,981.48)
  other v1: 1397.8,580.77
  other v2: 1984,205 2050,205 2142,205 2207,205
P2V8-VGEN6: C6.1 J3.17 R3.1 U1.41 | length 955.8
  Top Layer w10: U1.41@2112.64,542.49 2112.64,477.22 v2(2115,474.85)
  Top Layer w12: v2(1959.57,159.49) 1966,153.06 R3.1@1966,130
  Signal Layer 1 w15: v2(1959.57,159.49) 1959.57,160 1992,160 2016.89,184.89 2016.89,220.89 2090,294 2090,449.85 v2(2115,474.85)
  Signal Layer 2 w15: v2@2112.64,472.49 v2(2115,474.85) 2115,567.39 2174.67,627.06 2205.22,627.06 2208.06,624.22 2225.87,624.22 2240,638.35 2240,660.58 v2(2286,706.58)
  Bottom Layer w10: v2(2286,706.58) 2288.08,708.66 J3.17@2362.2,708.66
  Bottom Layer w15: v2(2115,474.85) 2131.92,457.93 C6.1@2131.92,442.57
P3V0-VDDHIGH-SW2: C33.1 C34.1 C84.1 C85.1 D2.1 L4.2 U1.25 U3.H9 U3.J9 | length 721
  Top Layer w10: U3.J9@934.41,1523.32 v1(950.16,1539.07) U3.H9@934.41,1554.82 ; v2(997,2127) 997,2111.27 D2.1@1013.78,2094.49 1028.65,2109.36 v2(1028.65,2127) ; v2(1019.3,2040.2) 1019.3,2013.25 C85.1@1032.48,2000.07 1045.7,2013.28 v2(1045.7,2040.2) ; v2(1819.72,505.13) 1812.07,512.78 1812.07,561.18 1823.77,572.88 1823.77,610.92 1838.1,625.24 U1.25@1852.72,625.24
  Signal Layer 2 w15: v2(1819.72,505.13) 1819.72,262.67 v2(1881,201.39)
  Bottom Layer w10: C84.1@924.24,1547.27 941.97,1547.27 v1(950.16,1539.07)
  other v2: 1744,201.39 1788.22,201.39 1829.96,201.39 2332,1192 2360,1192 2388,1192
P3V3-LICELL: C9.1 J3.19 U1.42 | length 437.8
  Top Layer w10: U1.42@2132.32,542.49 2132.32,502.73 v2(2137.05,498)
  Signal Layer 2 w15: v2(2137.05,498) 2140.74,501.69 2140.74,525.24 2155.5,540 2212.03,540 2271,598.97 2271,648.95 v2(2311.02,688.98)
  Bottom Layer w10: C9.1@2126.02,537.45 2126.02,509.03 v2(2137.05,498) ; v2(2311.02,688.98) J3.19@2362.2,688.98
P3V3-PERI: C92.1 C93.1 C95.1 C96.1 C97.1 C98.1 C99.1 C103.1 C104.1 C105.1 C106.1 C107.1 C192.1 C193.1 C194.1 C195.1 C196.1 C197.1 C198.1 J3.9 J3.10 J3.11 J3.12 J3.13 J3.14 J3.15 J3.16 R7.2 R8.2 R11.1 R12.1 R14.1 R15.1 R16.1 R17.1 R18.1 R21.2 R22.2 R23.2 R26.2 R42.2 R43.2 R48.1 R49.1 R50.1 R51.1 R52.1 R53.1 R54.1 R55.1 R56.1 R57.1 R58.1 R59.1 R60.1 R61.1 R62.1 R63.1 U1.55 U2.4 U3.G14 U3.G15 U3.G16 U3.G17 U3.J7 U3.K19 U3.L19 U3.M19 U3.N7 U3.P7 U3.P19 U3.R19 U4.5 U5.5 U6.5 U11.AA3 U11.AA5 U11.K6 U11.M6 U11.N5 U11.T10 U11.U9 U11.W4 U11.Y4 U14.4 | length 2840.5
  Top Layer w7: v1(855.65,1539.07) U3.J7@871.4,1523.32
  Top Layer w10: v2@478.02,1456.71 521.2,1456.71 532.9,1468.42 R26.2@532.9,1480.34 ; v2(509.28,1338.6) R17.1@532.9,1338.6 ; v2(509.28,1385.85) R18.1@532.9,1385.85 ; v2(509.28,1433.09) R14.1@532.9,1433.09 ; v2(509.28,1669.31) R21.2@532.9,1669.31 ; v1(855.65,1350.09) U3.P7@871.4,1365.84 ; v1(855.65,1381.59) U3.N7@871.4,1397.34 ; U3.G14@1091.88,1586.32 v1(1107.63,1602.07) ; U3.G15@1123.37,1586.32 v1(1139.12,1602.07) ; U3.G16@1154.87,1586.32 v1(1170.62,1602.07) ; U3.G17@1186.36,1586.32 v1(1202.11,1602.07) ; v1(1233.61,1350.1) U3.P19@1249.36,1365.84 ; U3.R19@1249.36,1334.35 v1(1265.1,1350.1) ; U3.M19@1249.36,1428.84 v1(1265.1,1444.58) U3.L19@1249.36,1460.33 1251.61,1462.58 1251.61,1489.58 U3.K19@1249.36,1491.83 1249.59,1491.83 v1(1265.1,1507.34) ; v2(1374.05,1969.29) 1374.05,1942.34 C97.1@1387.23,1929.15 1400.45,1942.37 v2(1400.45,1969.29) ; v2(1543,1180) 1543.9,1180 1544.25,1180.35 R11.1@1544.25,1203.95 ; v2(1633.36,1345.02) 1606.45,1345.02 C96.1@1593.23,1358.24 1606.41,1371.42 v2(1633.36,1371.42) ; v2(1643.74,729.61) U6.5@1673.99,729.61 ; v2(1643.74,843.79) U5.5@1673.99,843.79 ; R56.1@1820.52,1308.85 R57.1@1820.52,1352.16 v2(1843.87,1352.16) ; R48.1@1820.52,1395.46 R59.1@1820.52,1438.77 v2(1843.87,1438.77) ; R49.1@1820.52,1482.08 R63.1@1820.52,1525.39 v2(1843.87,1525.39) ; R54.1@1820.52,1568.69 R52.1@1820.52,1612 v2(1843.87,1612) ; U11.K6@1822.84,1874.01 1834.01,1874.01 v2(1842,1882) 1849.99,1874.01 U11.M6@1862.21,1874.01 ; v2(1871,1834) 1881.89,1844.89 U11.N5@1881.89,1854.33 ; v2(1928,1931) 1940.95,1943.95 U11.T10@1940.95,1952.75 ; U11.U9@1960.63,1933.07 1973.07,1933.07 v2(1981,1941) ; v2(1978.36,1834.64) U11.W4@2000,1834.64 U11.Y4@2019.69,1834.64 ; R60.1@2011.51,1308.83 R62.1@2011.51,1352.14 v2(2034.87,1352.14) ; R61.1@2011.51,1395.45 R58.1@2011.51,1438.76 v2(2034.87,1438.76) ; R55.1@2011.51,1482.06 R50.1@2011.51,1525.37 v2(2034.87,1525.37) ; R51.1@2011.51,1568.68 R53.1@2011.52,1611.98 v2(2034.87,1611.98) ; U11.AA3@2039.37,1814.96 2042.94,1814.96 v2(2059,1798.9) ; U11.AA5@2039.37,1854.33 2047.33,1854.33 2058,1865 v2(2063.86,1865) ; U1.55@2156.02,802.41 2182.32,802.41 v2(2208.91,829) ; R7.2@2180.34,927.99 v2(2204.72,927.99) ; v2(2208.66,1460.51) C195.1@2208.66,1488.19 ; C193.1@2212,1565 v2(2249.4,1565) ; v2(2392,1126) U14.4@2392,1154 ; v2(2392.57,975.43) U2.4@2392.57,1005.81 ; R8.2@2540,1034.93 2540,1031.81 v2(2558,1013.81)
  Bottom Layer w10: v2(485.65,1551.2) 521.2,1551.2 532.9,1562.9 R22.2@532.9,1574.82 ; v2(509.28,1338.6) R16.1@532.9,1338.6 ; v2(509.28,1385.85) R15.1@532.9,1385.85 ; v2(509.28,1433.09) R12.1@532.9,1433.09 ; v2(509.28,1669.31) R23.2@532.9,1669.31 ; v1(855.65,1350.09) 853.76,1351.97 C104.1@853.76,1365.77 853.76,1379.71 v1(855.65,1381.59) ; C105.1@876.6,1527.19 867.54,1527.19 v1(855.65,1539.07) 868.17,1551.6 C106.1@876.6,1551.6 ; v1(1107.63,1602.07) 1111.65,1598.05 C92.1@1123.45,1598.05 1135.1,1598.05 v1(1139.12,1602.07) 1143.14,1598.05 C99.1@1154.95,1598.05 1166.6,1598.05 v1(1170.62,1602.07) 1174.64,1598.05 C98.1@1186.44,1598.05 1198.09,1598.05 v1(1202.11,1602.07) 1208.09,1596.09 C107.1@1208.09,1582.7 ; C95.1@1262.82,1428.37 1262.82,1442.3 v1(1265.1,1444.58) 1263.21,1446.47 C103.1@1263.21,1460.26 C93.1@1263.21,1491.75 1263.21,1505.46 v1(1265.1,1507.34) ; v2(1643.74,843.79) 1651.61,835.91 U4.5@1673.99,835.91 ; C198.1@1811,1884 1840,1884 v2(1842,1882) ; v2(1871,1834) 1886.48,1818.52 R43.2@1886.48,1809 ; C197.1@1904.37,1924 1921,1924 v2(1928,1931) ; v2(1978.36,1834.64) 1981.52,1831.48 R42.2@2006,1831.48 ; v2(1981,1941) 1984,1944 C194.1@1984,1967 ; C196.1@2054.37,1768.91 2054.37,1794.27 v2(2059,1798.9) ; v2(2063.86,1865) 2069.86,1859 C192.1@2103.34,1859 ; v2(2311.02,728.35) J3.15@2362.2,728.35 ; v2(2311.02,767.72) J3.11@2362.2,767.72 ; J3.13@2362.2,748.03 v2(2413.39,748.03) ; J3.9@2362.2,787.4 v2(2413.39,787.4) ; v2(2444.88,728.35) J3.16@2496.06,728.35 ; v2(2444.88,767.72) J3.12@2496.06,767.72 ; J3.14@2496.06,748.03 v2(2547.24,748.03) ; J3.10@2496.06,787.4 v2(2547.24,787.4)
  other v2: 478,1456.69
PCIE-DIS-B: U3.T1
PCIE-PWR-EN: J2.20 U3.P5 | length 1192.5
  Top Layer w7: v1(792.66,1350.09) U3.P5@808.41,1365.84
  Signal Layer 2 w4.5: v2(338.58,1771.65) 338.58,1797.42 299.75,1836.25 299.75,1902.75 308,1911 326.05,1911 354.05,1939 372,1939 557,1754 557,1582.86 583.86,1556 614,1556 629,1541 629,1460 656,1433 656,1397 687.56,1365.44 777.31,1365.44 v1(792.66,1350.09)
  Bottom Layer w4.7: J2.20@236.22,1771.65 v2(338.58,1771.65)
PCIE-RST-B: J2.18 U3.R1 | length 1023.2
  Top Layer w4.7: v2(307,1791.34) 307,1726 322,1711 370,1711 420.3,1660.7 420.3,1423.35 339.7,1342.75 339.7,1325.16 377.44,1287.42 635.5,1287.42 U3.R1@682.43,1334.35
  Bottom Layer w4.7: J2.18@236.22,1791.34 v2(307,1791.34)
PCIE-RX_N: U3.B1 | length 22.3
  Top Layer w7: v1(666.68,1759.55) U3.B1@682.43,1743.8
PCIE-RX_P: U3.B2 | length 22.3
  Top Layer w7: v1(698.17,1759.55) U3.B2@713.92,1743.8
PCIE-TX_N: U3.A3 | length 22.3
  Top Layer w7: v1(729.67,1791.04) U3.A3@745.42,1775.29
PCIE-TX_P: U3.B3 | length 22.3
  Top Layer w7: v1(729.67,1759.55) U3.B3@745.42,1743.8
PCIE-WAKE-B: U3.P3 | length 22.3
  Top Layer w7: v1(729.67,1350.09) U3.P3@745.42,1365.84
PCIECLK_N: U3.C7 | length 22.3
  Top Layer w7: v1(855.65,1728.05) U3.C7@871.4,1712.3
PCIECLK_P: U3.D7 | length 22.3
  Top Layer w7: v1(855.65,1696.55) U3.D7@871.4,1680.8
PERI-RST: J2.16 U3.B16 | length 1881.9
  Top Layer w4.7: U3.B16@1154.87,1743.8 1171.1,1760.03 1171.1,1798.1 1302,1929 1302,2032.12 1338.38,2068.5 v2(1338.38,2096)
  Signal Layer 2 w4.5: v2(184.5,1811.02) 180,1815.52 180,2010.9 232.1,2063 874.17,2063 882.17,2055 1000,2055 1012,2067 1273,2067 1302,2096 v2(1338.38,2096)
  Bottom Layer w4.7: v2(184.5,1811.02) J2.16@236.22,1811.02
PMIC-INT-B: R7.1 U1.1 U3.P6 | length 4312.5
  Top Layer w7: v1(824.16,1350.09) U3.P6@839.91,1365.84
  Top Layer w10: U1.1@2132.32,845.79 v2(2132.32,873.22) 2155.1,873.22 R7.1@2180.34,898.47
  Bottom Layer w4.7: v1(824.16,1350.09) 827.21,1350.09 843.35,1333.95 862,1333.95 871,1324.96 871,1250.06 880.79,1240.26 892.71,1240.26 902.5,1230.47 902.5,1154.77 892.71,1144.97 767.51,1144.97 699.8,1144.99 654.81,1100 554.76,1100 452,997.24 452,656 485.7,622.3 485.7,266.3 675,77 2154,77 2262,185 2262,478 2228.77,511.23 2228.77,556.74 2261,588.97 2261,772 2223,810 2175,810 2132.32,852.68 v2(2132.32,873.22)
PMIC-ON-REQ: J3.22 U3.D11 | length 3033.4
  Top Layer w10: U3.D11@997.39,1680.8 v1(1013.15,1696.55)
  Signal Layer 2 w4.5: v2(1062,1937) 1080,1919 1256,1919 1427.91,1747.09 1558.14,1747.09 1642.23,1663 1788.79,1663 1847.29,1721.5 2361.48,1721.5 2387.5,1695.48 2387.5,1488.45 2231.5,1332.45 2231.5,897.78 2258.28,871 2314.85,871 2378,807.85 2378,732 2404,706 v2(2413.39,706)
  Bottom Layer w4.7: v1(1013.15,1696.55) 1028.48,1711.88 1028.48,1811.1 1067.98,1850.6 1067.98,1931.02 v2(1062,1937) ; v2(2413.39,706) 2413.39,696.61 2440.71,669.29 J3.22@2496.06,669.29
PMIC-POWERON: J3.60 U1.56 | length 894.8
  Top Layer w10: U1.56@2156.02,822.09 2165.26,822.09 2178,834.83 v2(2178,852)
  Signal Layer 2 w4.5: v2(2178,852) 2215.83,852 2280.43,787.4 2319.6,787.4 2355.5,751.5 2355.5,729.5 2399.46,685.54 2422.85,685.54 2435.66,672.73 2449.27,672.73 2461.13,660.87 2461.13,485.39 2451.61,475.88 2435.34,475.88 2394,434.54 2394,346.16 v2(2444.88,295.28)
  Bottom Layer w4.7: v2(2444.88,295.28) J3.60@2496.06,295.28
PMIC-STBY-REQ: R2.1 U3.F11 | length 2424.2
  Top Layer w10: v1(981.64,1633.56) U3.F11@997.39,1617.81 ; R2.1@2077.09,928.06 v2(2103.34,928.06)
  Signal Layer 2 w10: v1(981.64,1633.56) 1001.12,1614.08 1019.1,1614.08 1036.97,1631.95 1062.95,1631.95 1117,1686 1117,1707.16 1155.89,1746.05 1398.55,1746.05 1415.6,1729 1547,1729 1628,1648 2009.87,1648 2034.87,1673 2081,1673 2089,1665 2129,1665 2141,1677 2230,1677 2251,1698 2329.5,1698 2355,1672.5 2355,1497 2207.91,1349.91 2207.91,1032.63 v2(2103.34,928.06)
PMIC-VSNVS: C11.1 C90.1 D2.2 R1.2 R44.2 R45.2 R46.2 R47.2 R82.1 U1.43 U3.G11 U12.2 U12.5 U13.2 U13.5 | length 1504.1
  Top Layer w10: v2(595.86,1954.95) R45.2@595.86,1930.11 R44.2@639.17,1930.11 ; v2(682.48,1954.95) R46.2@682.48,1930.11 R47.2@725.78,1930.11 ; v1(981.63,1570.57) U3.G11@997.39,1586.32 ; U12.5@1007.88,2286.29 v2(1007.88,2315.27) ; U12.2@1033.47,2201.29 v2(1033.47,2230.27) ; D2.2@1120.08,2094.49 v2(1120.08,2126.92) ; U13.5@1129.92,2286.29 v2(1129.92,2315.27) ; U13.2@1155.52,2201.29 v2(1155.52,2230.27) ; U1.43@2156.02,566.19 2156.02,521.23 v2@2162.24,515.01
  Signal Layer 1 w15: v2(2162.24,515.4) 2184.4,515.4 2258.9,589.9 2258.9,795.58 2275.78,812.46 v2(2275.78,838) 2275.78,888.44 2316,928.67 2316,946.77 2404,1034.77 2404,1045 2448,1089 2448,1166.73 2477,1195.73 v2(2477,1300)
  Bottom Layer w10: v1(981.63,1570.57) 981.72,1570.66 C90.1@981.72,1590.18 ; R82.1@1122,2221 1146.25,2221 v2(1155.52,2230.27) ; v2(2162.24,515.4) 2166.57,519.73 C11.1@2166.57,537.84
  Bottom Layer w15: R1.2@2166.57,898.34 2169.9,898.34 2230.24,838 v2(2275.78,838)
POR-B: J3.18 R1.1 U1.3 U3.C11 U14.2 | length 3956
  Top Layer w4.5: U1.3@2092.95,845.79 v2@2092.95,872.02 ; v2(2368,958) 2383.25,958 2496.06,845.18 2496.06,733.43 2520.83,708.66 v2(2547.24,708.66) ; v2(2454,1257.25) 2468,1243.25 U14.2@2468,1229
  Top Layer w4.7: U3.C11@997.39,1712.3 983.04,1726.65 983.04,1794 1080.04,1891 1215.12,1891 1275,1950.88 1275,2074 1384,2183 2297,2183 v2(2384,2096)
  Top Layer w10: v2@2092.95,872.02 v2(2095,874.07)
  Signal Layer 2 w4.5: v2(2368,958) 2367.09,958 2344.77,980.32 2344.77,1136.23 2370.54,1162 2463.65,1162 2477,1175.35 2477,1257 ; v2(2384,2096) 2520.94,1959.06 2520.94,1305 2477,1261.06 2477,1257 ; v2(2454,1257.25) 2476.75,1257.25 2477,1257
  Bottom Layer w4.5: v2(2095,874.07) 2119.47,898.54 R1.1@2136.85,898.54 ; R1.1@2135.26,900.14 2135.26,935.84 2146.36,946.94 2212.57,946.94 2248.21,911.3 2353,911.3 2368,926.3 v2(2368,958)
  Bottom Layer w4.7: J3.18@2496.06,708.66 v2(2547.24,708.66)
  Bottom Layer w10: R1.1@2135.26,900.14 2136.85,898.54 R1.1@2137.05,898.34
PWR-BTN-SNS: J4.4 U3.J19 | length 3326.8
  Top Layer w10: U3.J19@1249.36,1523.32 v1(1265.11,1539.07)
  Signal Layer 2 w4.5: v2(166,1117) 148,1135 148,1361.85 180.95,1394.79 205.33,1394.79 259,1448.46 259,1512.64 280.16,1533.8 325.37,1533.8 331,1539.43 331,1639.56 338.25,1646.81 338.25,1663.75 322.06,1679.94 322.06,1727.38 270,1779.44 270,1913.38 322,1965.37 467.41,1965.37 491.04,1989 964.25,1989 993.29,1959.96 1251.04,1959.96 1446.91,1764.09 1531.39,1764.09 1546.38,1779.08 1546.38,1795 1570,1818.62 v2(1570,1885)
  Bottom Layer w4.7: v2(166,1117) 210,1117 290,1037 290,982.48 272.08,964.57 J4.4@236.22,964.57 ; v1(1265.11,1539.07) 1280.46,1554.42 1280.46,1607.64 1291.03,1618.21 1302.96,1618.21 1311.95,1627.2 1311.95,1639.12 1321.74,1648.91 1396.91,1648.91 1410,1662 1410,1676.7 1436,1702.7 1436,1809 1488.35,1861.35 1546.35,1861.35 v2(1570,1885)
RGMII-INT: J1.34 U3.W22 | length 1881.5
  Top Layer w4.7: v2(2419,1303) 2414.14,1303 2397.04,1320.1 2397.04,1707.56 2441.44,1751.97 v2(2547.24,1751.97)
  Top Layer w10: U3.W22@1343.84,1208.36 v1(1359.59,1192.61)
  Signal Layer 1 w4.5: v1(1359.59,1192.61) 1374.84,1207.86 1457.02,1207.86 1462.91,1201.97 1545.61,1201.97 1559.25,1188.33 1559.25,1168.75 1610,1118 2193.14,1118 2297.14,1222 2392.17,1222 2419.17,1249 2419.17,1302.83 v2(2419,1303)
  Bottom Layer w4.7: J1.34@2496.06,1751.97 v2(2547.24,1751.97)
RGMII-MDC: J1.36 U3.V20 | length 1864.9
  Top Layer w4.7: v2(2351,1278) 2378.6,1278 2389.6,1289 2406,1289 2417,1278 2431.61,1278 2441.3,1287.69 2441.3,1462.7 2423,1481 2423,1521 2438,1536 2438,1565.37 2424.68,1578.68 2424.68,1598.11 2444.88,1618.31 v2(2444.88,1732.28)
  Top Layer w10: U3.V20@1280.85,1239.86 v1(1296.6,1224.11)
  Signal Layer 1 w4.5: v1(1296.6,1224.11) 1312.17,1239.68 1337,1239.68 1344.34,1247.01 1344.34,1261.92 1365.41,1283 1471.02,1283 1492.52,1261.5 1547.02,1261.5 1609,1199.52 1609,1170.1 1632.59,1146.5 2185.79,1146.5 2317.29,1278 v2(2351,1278)
  Bottom Layer w4.7: v2(2444.88,1732.28) J1.36@2496.06,1732.28
RGMII-MDIO: J1.38 U3.V23 | length 1746.6
  Top Layer w4.7: v2(2397,1268) 2437,1268 2452,1283 2452,1359.11 2530.89,1438 2530.89,1696.25 v2(2547.24,1712.6)
  Top Layer w10: U3.V23@1375.34,1239.86 v1(1391.09,1224.11)
  Signal Layer 1 w4.5: v1(1391.09,1224.11) 1406.34,1239.36 1462.64,1239.36 1486,1216 1550,1216 1572.75,1193.25 1572.75,1191.73 1567.75,1186.73 1567.75,1173.27 1612.02,1129 2192.19,1129 2296.19,1233 2376.7,1233 2397,1253.3 v2(2397,1268)
  Bottom Layer w4.7: J1.38@2496.06,1712.6 v2(2547.24,1712.6)
RGMII-NRST: J1.30 U3.U21 | length 1880
  Top Layer w4.7: v2(2338,1303) 2341.75,1303 2351.05,1312.3 2351.05,1701.05 2441.34,1791.34 v2(2547.24,1791.34)
  Top Layer w10: U3.U21@1312.35,1271.36 v1(1328.1,1255.61)
  Signal Layer 1 w4.5: v1(1328.1,1255.61) 1328.1,1264.28 1358.17,1294.35 1477.48,1294.35 1501.82,1270 1550.54,1270 1617.5,1203.04 1617.5,1173.62 1636.12,1155 2182.34,1155 2330.34,1303 v2(2338,1303)
  Bottom Layer w4.7: J1.30@2496.06,1791.34 v2(2547.24,1791.34)
RGMII-RXCLK: J1.14 U3.B25 | length 1662.4
  Top Layer w4.7: U3.B25@1438.33,1743.8 1658.11,1743.8 1682.01,1719.9 1755.19,1719.9 1769.84,1705.25 2073.25,1705.25 2093.87,1725.87 2163.87,1725.87 2223,1785 2233.39,1785 2241,1777.39 2241,1754 2247,1748 2262,1748 2270,1756 2270,1778 2277,1785 2288,1785 2297,1776 2297,1764 2301,1760 2313.56,1760 2321,1767.44 2321,1779 2327,1785 2366.39,1785 2426.19,1844.81 2466.11,1844.81 2493,1871.7 2493,1909 2498,1914 2514.65,1914 2522,1921.35 2522,1942 2515.18,1948.82 2505.18,1948.82 2497,1957 2497,1977.5 2461,2013.5 2461,2037 2472,2048 2499,2048 2512,2035 2512,1995 2547.24,1959.76 v2(2547.24,1948.82)
  Bottom Layer w4.7: J1.14@2496.06,1948.82 v2(2547.24,1948.82)
RGMII-RXD0: J1.20 U3.C24 | length 1673.6
  Top Layer w4.7: U3.C24@1406.84,1712.3 1422.59,1728.05 1618.05,1728.05 1624,1734 1649.68,1734 1674.48,1709.2 1752.8,1709.2 1770,1692 1770,1675.5 1774.5,1671 1786.77,1671 1793,1677.23 1793,1691.55 1798,1696.55 1810,1696.55 1816,1690.55 1816,1677.22 1820.22,1673 1832,1673 1838,1679 1838,1692.55 1842,1696.55 1856,1696.55 1863.1,1689.45 1892.9,1689.45 1900,1696.55 2088.55,1696.55 2105.95,1713.95 2177.95,1713.95 2207,1743 2220,1743 2226,1737 2226,1694.45 2234.45,1686 2245,1686 2251,1692 2251,1726 2257.28,1732.28 2273.72,1732.28 2280,1726 2280,1692 2288,1684 2301,1684 2307,1690 2307,1730 2318.5,1741.5 2348.5,1741.5 2439,1832 2455,1832 2478,1809 2522,1809 2539,1826 2539,1855 2532.7,1861.3 2514.28,1861.3 2508,1867.58 2508,1890 2513,1895 2539,1895 v2(2547,1903)
  Bottom Layer w4.7: J1.20@2496.06,1889.76 2533.76,1889.76 v2(2547,1903)
RGMII-RXD1: J1.18 U3.B23 | length 1662.3
  Top Layer w4.7: U3.B23@1375.34,1743.8 1389.69,1758.15 1389.69,1783.69 1421.09,1815.09 1619.05,1815.09 1656.14,1778 1671,1778 1699,1750 1799,1750 1817.65,1731.35 1844.35,1731.35 1868,1755 1982,1755 2005.65,1731.35 2041.55,1731.35 2095,1784.8 2095,1892.33 2105.67,1903 2143.33,1903 2151,1895.33 2151,1882.57 2144.43,1876 2128,1876 2118.73,1866.73 2118.73,1843.27 2130,1832 2148,1832 2169,1853 2193,1853 2205.35,1840.65 2348.12,1840.65 2353.72,1846.24 2353.72,1855 2348.72,1860 2336.07,1860 2330.96,1865.11 2330.96,1877.96 2340,1887 2353,1887 2367.55,1872.45 2379.45,1872.45 2387,1880 2387,1889.64 2372,1904.64 2372,1921 2379,1928 2401,1928 v2(2440,1889)
  Bottom Layer w10: v2(2440,1889) 2440,1895 2454.45,1909.45 J1.18@2496.06,1909.45
RGMII-RXD2: J1.16 U3.B24 | length 1662.6
  Top Layer w4.7: U3.B24@1406.84,1743.8 1422.15,1759.11 1661.89,1759.11 1692.4,1728.6 1758.79,1728.6 1773.44,1713.95 2060.95,1713.95 2088,1741 2152,1741 2214,1803 2367,1803 2421,1857 2456.43,1857 2479,1879.57 2479,1965 2472.5,1971.5 2465.21,1971.5 2457.71,1964 2450,1964 2443,1971 2443,1981 2446.25,1984.25 2446.25,1997.75 2439.88,2004.12 2410.88,2004.12 2406,2009 2406,2022 2419.88,2035.88 2419.88,2048.12 2412,2056 2398,2056 2380,2038 2380,1974.82 2392.82,1962 2412.01,1962 v2(2444.88,1929.13)
  Bottom Layer w4.7: v2(2444.88,1929.13) J1.16@2496.06,1929.13
RGMII-RXD3: J1.22 U3.D23 | length 1662.5
  Top Layer w10: U3.D23@1375.34,1680.8 v1(1391.09,1696.55)
  Bottom Layer w4.7: v1(1391.09,1696.55) 1391.09,1706.34 1406.44,1721.69 1406.44,1734.41 1406,1734.85 1406,1808.84 1510.86,1913.7 1644.7,1913.7 1691,1960 1691,1971.15 1682.5,1979.65 1682.5,1989.5 1689,1996 1699,1996 1709,1986 1717,1986 1725,1994 1725,2017.61 1740.39,2033 2205.22,2033 2222,2049.78 2222,2081 2264.75,2123.75 2392.55,2123.75 2423.65,2092.65 2423.65,1878.35 2431,1871 2431,1870.08 J1.22@2496.06,1870.08
RGMII-RXDV: J1.24 U3.D22 | length 1662.7
  Top Layer w10: U3.D22@1343.84,1680.8 v1(1359.59,1696.55)
  Bottom Layer w4.7: v1(1359.59,1696.55) 1374.94,1681.2 1397.45,1681.2 1419.05,1702.8 1419.05,1809.65 1514.4,1905 1654.14,1905 1771.14,2022 2206.45,2022 2234,2049.55 2234,2075.1 2274,2115.1 2388.97,2115.1 2414,2090.07 2414,1867 2430.61,1850.39 J1.24@2496.06,1850.39